# Altium PCB 4_iip_camera.PcbDoc
Units mm, origin at the board's own origin, x right, y up, seen from the top; angles counter-clockwise.
Board outline 67.5 x 28 mm, 2 copper layers (Top Layer, Bottom Layer), stack 1.571 mm thick; 4 components, 1 nets, 7 pads, 0 vias.
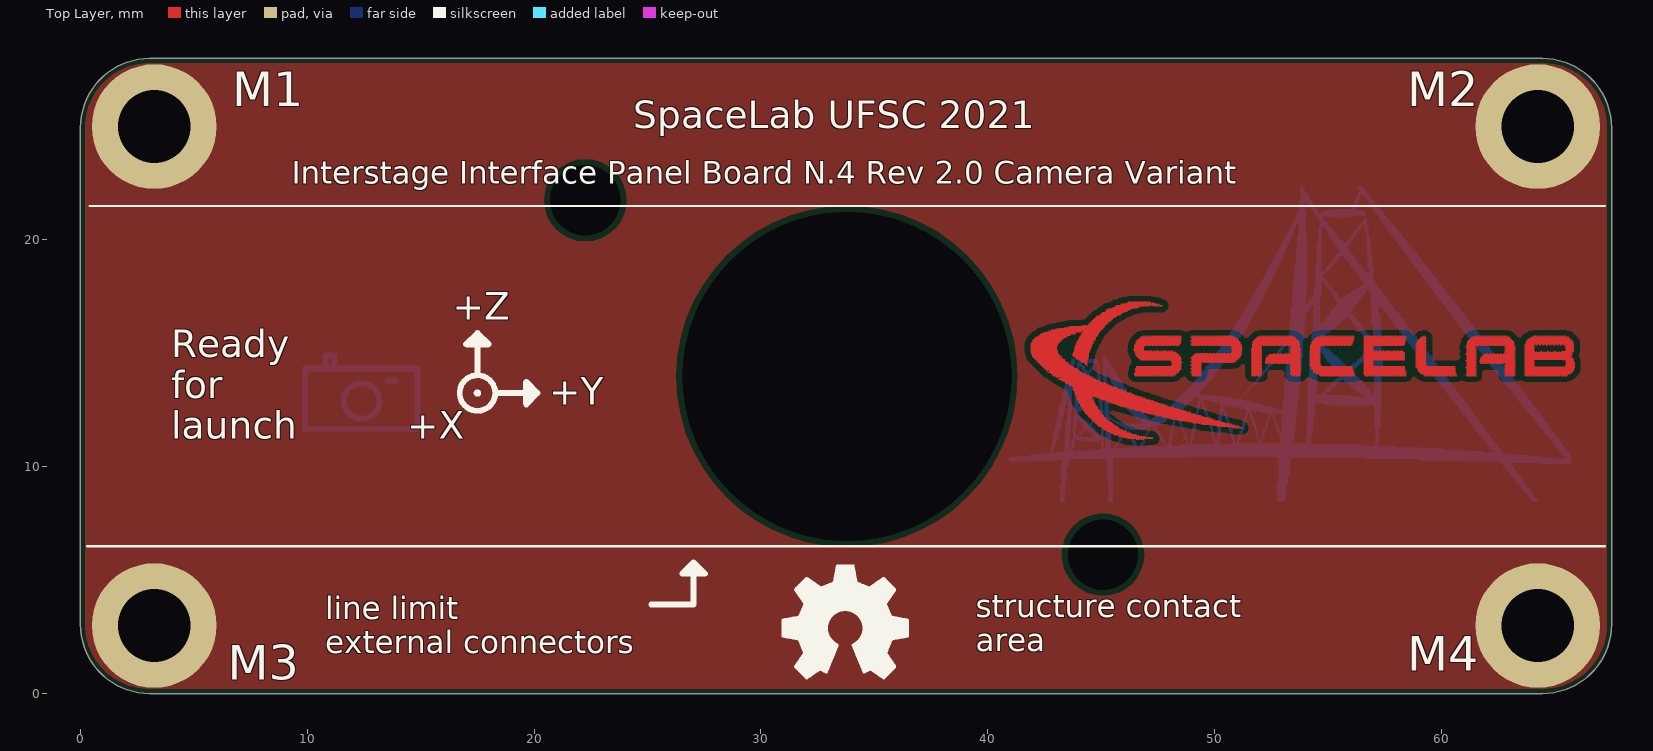
[diagram p0: Top Layer view]
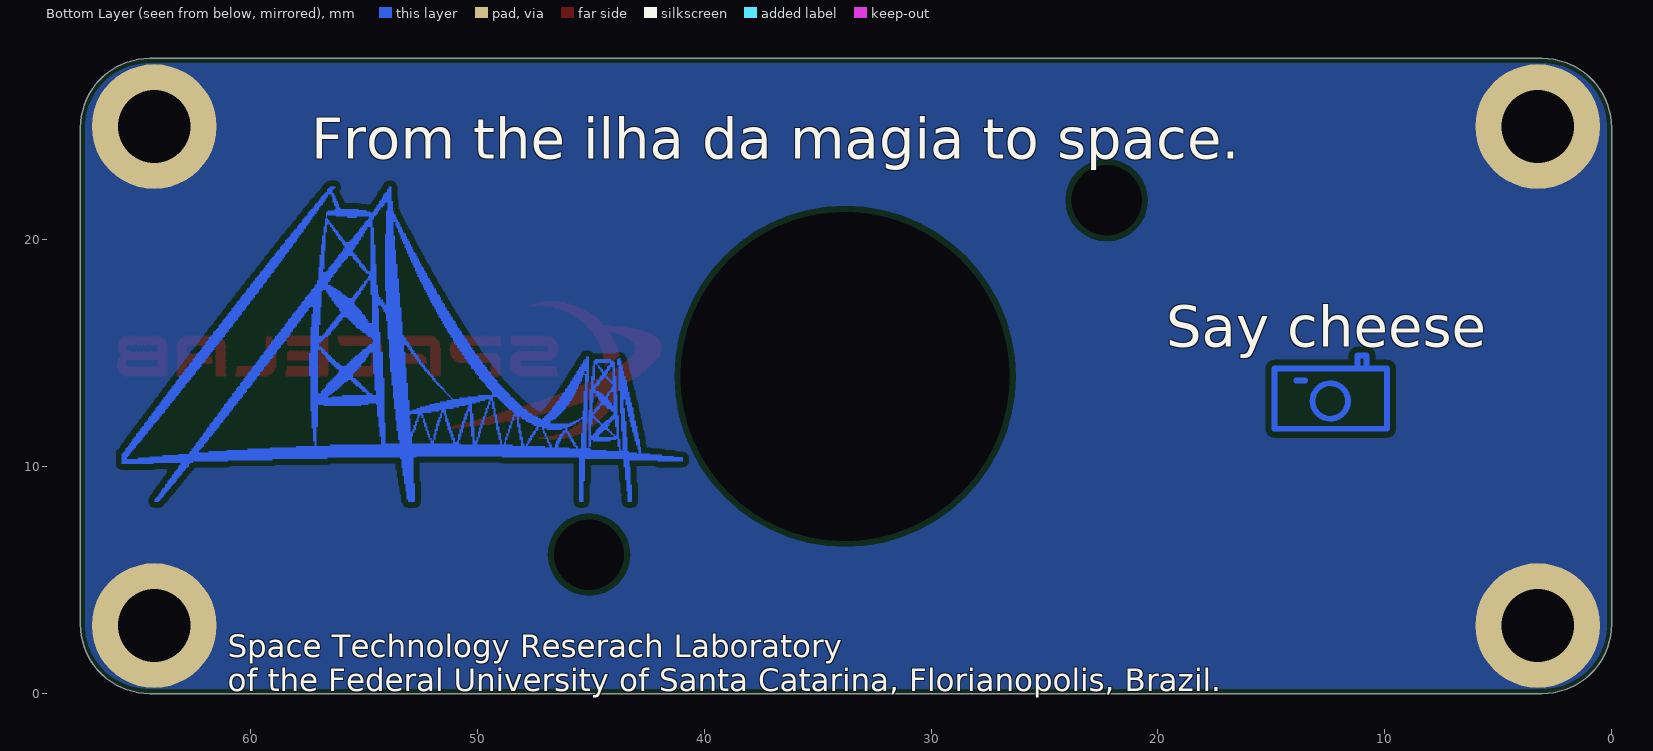
[diagram p1: Bottom Layer view, seen from below]

## Layer stack, top to bottom
Top Solder: solder mask 0.0102, Solder Resist, Dk 3.5
Top Layer: signal copper 0.0356
Dielectric 1: dielectric 1.5, FR-4, Dk 4.8
Bottom Layer: signal copper 0.0356
Bottom Solder: solder mask 0.0102, Solder Resist, Dk 3.5

## Board outline
0,3.048 ccw(c3.048,3.048) 3.048,0 64.452,0 ccw(c64.452,3.048) 67.5,3.048 67.5,24.952 ccw(c64.452,24.952) 64.452,28 3.048,28 ccw(c3.048,24.952) 0,24.952

## Design rules (kind name [scope] priority, off if disabled: settings)
BoardOutlineClearance BoardOutlineClearance_JLCPCB [All] p1: gap=0.2 ignorepadtopadclearanceinfootprint=FALSE
BoardOutlineClearance [All] p2: gap=0.254 ignorepadtopadclearanceinfootprint=FALSE except(0: Arc-SplitContinuation Track-SplitContinuation SMDPad-SplitContinuation THPad-SplitContinuation Via-SplitContinuation Fill-SplitContinuation Poly-SplitContinuation Region-SplitContinuation Text-SplitContinuation)
Clearance Clearance_JLCPCB_capabilities [All] p1: gap=0.254 ignorepadtopadclearanceinfootprint=FALSE except(0: SMDPad-Hole THPad-Hole Via-Hole Fill-Hole Poly-Hole Region-Hole Text-Hole; 0.127: Arc-Arc Arc-Track Track-Track SMDPad-SMDPad; 0.15: SMDPad-Text THPad-Text; 0.152: SMDPad-THPad; 0.2: Arc-SMDPad Track-SMDPad; 0.33: Arc-THPad Track-THPad; 0.54: THPad-THPad) // Minimal clearances considering JLCPCB manufacturing
Clearance [All] p2: gap=0.254 ignorepadtopadclearanceinfootprint=FALSE except(0: Arc-Hole Track-Hole SMDPad-Hole THPad-Hole Via-Hole Fill-Hole Poly-Hole Region-Hole Text-Hole) // Default altium designer clearence rule
HoleSize HoleSize_JLCPCB_capabilities [All] p1: absolutevalues=TRUE maxlimit=6.3 minlimit=0.3 maxpercent=80.000 minpercent=20.000
HoleSize [All] p2: absolutevalues=TRUE maxlimit=2.54 minlimit=0.025 maxpercent=80.000 minpercent=20.000
HoleToHoleClearance HoleToHoleClearance_JLCPCB [All] p1: gap=0.54 allowstackedmicrovias=TRUE
HoleToHoleClearance [All] p2: gap=0.254 allowstackedmicrovias=TRUE
MinimumAnnularRing AnnularRing_JLCPCB_1oz_capabilities [All] p1: minimumring=0.13
MinimumAnnularRing [All] p2: minimumring=0.254
MinimumSolderMaskSliver MinimumSolderMaskSliver_JLCPCB [All] p1: minsoldermaskwidth=0.2
MinimumSolderMaskSliver [All] p2: minsoldermaskwidth=0.254
PolygonConnect PolygonConnect_GND [InNet('GND')] p1: connectstyle=Direct reliefconductorwidth=0.254 reliefentries=4 polygonreliefangle="90 Angle" airgapwidth=0.254
PolygonConnect PolygonConnect_Power [(InNet('JTAG3_VCC') OR InNet('JTAG4_VCC'))] p2: connectstyle=Direct reliefconductorwidth=0.254 reliefentries=4 polygonreliefangle="90 Angle" airgapwidth=0.254 // Power polygons for power nets (debugger and battery charger)
PolygonConnect [All] p3: connectstyle=Relief reliefconductorwidth=0.254 reliefentries=4 polygonreliefangle="90 Angle" airgapwidth=0.254
RoutingVias RoutingVias_JLCPCB_capabilities [All] p1: holewidth=0.3 width=0.6 viastyle="Through Hole" minholewidth=0.3 minwidth=0.6 maxholewidth=0.711 maxwidth=1.27
RoutingVias [All] p2: holewidth=0.711 width=1.27 viastyle="Through Hole" minholewidth=0.711 minwidth=1.27 maxholewidth=0.711 maxwidth=1.27
SilkToSolderMaskClearance SilkToSolderMaskClearance_JLCPCB [IsPad] p1: minsilkscreentomaskgap=0.15 clearancetoexposedcopper=TRUE
SilkToSolderMaskClearance [IsPad] p2: minsilkscreentomaskgap=0.254 clearancetoexposedcopper=TRUE
SolderMaskExpansion SolderMaskExpansion_JLCPCB [All] p1: expansion=0.05
SolderMaskExpansion [All] p2: expansion=0.102
Width Width_JLCPCB_capabilities [All] p1: maxlimit=0.508 minlimit=0.127 preferedwidth=0.254 minimp=50.000000 maximp=50.000000 favimp=50.000000 // Width considering JLCPCB manufacturing
Width [All] p2: maxlimit=0.254 minlimit=0.254 preferedwidth=0.254
26 further rules are at their usual default settings.

## Components (designator, comment, footprint, x,y, rotation, side; value= is the part's Value field where it differs from the comment)
M1 "IB Mechanical Hole" "M3 hole (5.5mm pad)"#1 3.25,25 r0 top
M2 "IB Mechanical Hole" "M3 hole (5.5mm pad)"#1 64.25,25 r0 top
M3 "IB Mechanical Hole" "M3 hole (5.5mm pad)"#2 3.25,2 r0 top
M4 "IB Mechanical Hole" "M3 hole (5.5mm pad)"#2 64.25,2 r0 top

## Footprints (in the part's own frame and the unit in brackets; to place one, negate y for a bottom-side part, rotate by r counter-clockwise, add the part's x,y. Pads: shape width x height; smd on the part's side, far side on the other; paste and mask are expansions set on the pad)
"M3 hole (5.5mm pad)"#1 [mm]
  round 5.5 hole 3.2: 0(0,0)
"M3 hole (5.5mm pad)"#2 [mm]
  round 5.5 hole 3.2: 0(0,1)

## Part data
M1 M2 M3 M4: "Mechanical Hole for FloripaSat-2 interface boards"

## Free pads (board coordinates)
  round 0 hole 3.1: 0(22.257,21.747) 0(45.077,6.127)
  round 0 hole 14.5: 0(33.787,13.987)

## Nets (pads, with @x,y where several pads share a name; then routed paths per layer and width w, separated by ;. In a path a pad name is that pad's centre, name@x,y a point inside that pad or via, vN(x,y) a via of type N, cw(c..) or ccw(c..) an arc to the next point about the centre after c; other vN are vias at no path point)
GND: M1.0 M2.0 M3.0 M4.0
copper on no net: | length 22
  Bottom Layer w0.254: 10.8,14.4 10.8,14.9 11.197,14.9 11.2,14.897 11.2,14.338 ; 13.5,13.8 13.9,13.8 ; 9.9,11.671 14.862,11.671 14.862,14.338 9.9,14.338 9.9,11.671 ; 13.181,12.9 ccw(c12.4,12.9) 13.181,12.9

## Polygon pours and split planes (outlines as drawn)
GND on Top Layer "Top Layer-GND" (solid, remove dead copper, pour order 12): 0,24.952 cw(c3.048,24.952) 3.048,28 64.452,28 cw(c64.452,24.952) 67.5,24.952 67.5,3.048 cw(c64.452,3.048) 64.452,0 3.048,0 cw(c3.048,3.048) 0,3.048
GND on Bottom Layer "Top Layer-GND" (solid, remove dead copper, pour order 20): 0,24.952 cw(c3.048,24.952) 3.048,28 64.452,28 cw(c64.452,24.952) 67.5,24.952 67.5,3.048 cw(c64.452,3.048) 64.452,0 3.048,0 cw(c3.048,3.048) 0,3.048

## Other copper
Top Layer:
  region: 1334 vertices and 3 holes, not listed, extent 41.887,11.194 51.228,17.267
  region: 253 vertices and 3 holes, not listed, extent 63.682,14 65.873,15.768
  region: 386 vertices and 0 holes, not listed, extent 46.423,14 48.575,15.768
  region: 387 vertices and 0 holes, not listed, extent 56.571,14 58.454,15.768
  region: 511 vertices and 0 holes, not listed, extent 51.612,14 53.803,15.768
  region: 495 vertices and 0 holes, not listed, extent 61.068,14 63.259,15.768
  region: 407 vertices and 0 holes, not listed, extent 48.96,14 51.228,15.768
  region: 301 vertices and 0 holes, not listed, extent 54.187,14 56.148,15.768
  region: 201 vertices and 0 holes, not listed, extent 58.877,14 60.684,15.768
  region: 47.268,11.27 47.307,11.27 47.307,11.232 47.268,11.232 47.268,11.27 47.23,11.27 47.23,11.309 47.268,11.309
  text "'.Layer_Name'" at 177.571,-11.538 h2.5
Bottom Layer:
  region: 1551 vertices and 46 holes, not listed, extent 40.947,8.45 65.674,22.341
  text "'.Layer_Name'" at 177.571,-11.538 h2.5

## Silkscreen, mask and mechanical layers (free items; w line width, h text height)
Top Overlay:
  drawing of 988 lines, arcs and shapes, not listed
  text "SpaceLab UFSC 2021" at 24.375,24.925 h1.2
  text "Interstage Interface Panel Board N.4 Rev 2.0 Camera Variant" at 9.317,22.475 h1
  text "+Z" at 16.41,16.475 h1.2
  text "+Y" at 20.66,12.725 h1.2
  text "Ready / for / launch" at 4,11.225 h1.2
  text "+X" at 14.41,11.225 h1.2
  text "structure contact / area" at 39.475,1.869 h1
  text "line limit  / external connectors" at 10.8,1.784 h1
  text "'.Layer_Name'" at 177.571,-11.538 h2.5
Bottom Overlay:
  text "From the ilha da magia to space." at 57.325,23.575 h1.8
  text "Say cheese" at 19.634,15.291 h1.8
  text "Space Technology Reserach Laboratory / of the Federal University of Santa Catarina, Florianopolis, Brazil." at 61,0.1 h1
  text "'.Layer_Name'" at 177.571,-11.538 h2.5
Top Paste:
  text "'.Layer_Name'" at 177.571,-11.538 h2.5
Bottom Paste:
  text "'.Layer_Name'" at 177.571,-11.538 h2.5
Top Solder:
  drawing of 10 lines, arcs and shapes, not listed
  text "'.Layer_Name'" at 177.571,-11.538 h2.5
Bottom Solder:
  drawing of 11 lines, arcs and shapes, not listed
  text "'.Layer_Name'" at 177.571,-11.538 h2.5
Drill Guide:
  text "'.Layer_Name'" at 177.571,-11.538 h2.5
Board Edge:
  lines w0.2: 0,3.065 ccw(c3.065,3.065) 3.065,0 64.435,0 ccw(c64.435,3.065) 67.5,3.065 67.5,24.959 ccw(c64.459,24.959) 64.459,28 3.139,28 ccw(c3.139,24.861) 0,24.861 0,13.8 0,3.065
  text "'.Layer_Name'" at 193.8,-11.5 h2.5
Dimensions:
  circle w0.254: c33.75,14 r7.25
  circle w0.254: c22.257,21.747 r1.55
  circle w0.254: c45.077,6.127 r1.55
  circle w1: c33.75,14 r0.5
  circle w0.2: c64.25,25 r1.6
  circle w0.2: c64.25,2.975 r1.6
  circle w0.2: c3.25,3 r1.6
  circle w0.2: c3.25,25 r1.6
  region: 59,8.06 58.5,7.56 58,8.06
  lines w0.2: 0.3,6.5 67.15,6.5 ; 0.3,21.5 67.15,21.5
  lines w0.254: 32.64,11.697 34.915,11.697 ; 33.765,10.547 33.765,12.822 ; 35.098,16.157 35.098,15.157 ; 35.18,11.024 40.873,9.498 ; 35.686,10.183 35.186,11.049 36.052,11.549 ; 36.097,15.158 35.098,15.157 ; 40.347,20.408 35.098,15.157 ; 58,7.935 58.5,7.435 ; 58.5,10.1 58.5,9.3 58.5,7.435 ; 59,7.935 58.5,7.435 ; 18.547,-3.443 49.027,-3.443 49.027,26.837 18.547,26.837 18.547,-3.443
  text "Mechanical specs:" at 13.35,35.25 h1.5
  text "structure  / contact  / area" at 50.35,22.2 h1.2
  text "camera lens center" at 40.722,18.832 h1
  text "camera lens hole" at 28.5,14.1 h1
  text "external  / connectors  / area" at 3.1,11.6 h1.2
  text "line limit  / external  / connectors" at 52.1,10.6 h1.2
  text "camera / board / center" at 41.55,8.06 h1
  text "structure  / contact  / area" at 50.025,0.675 h1.2
  text "'.Layer_Name'" at 177.571,-11.538 h2.5
BOTTOM ASM:
  text "'.Layer_Name'" at 177.601,-11.533 h2.5
TOP ASM:
  text "'.Layer_Name'" at 177.571,-11.538 h2.5
Sheet:
  drawing of 228 lines, arcs and shapes, not listed
  text "1" at 8.746,161.611 h1.78
  text "2" at 81.39,161.611 h1.78
  text "3" at 154.542,161.611 h1.78
  text "4" at 227.44,161.611 h1.78
  text "A" at -25.595,138.599 h1.78
  text "A" at 261.425,138.599 h1.78
  text "B" at -25.595,90.542 h1.78
  text "B" at 261.425,90.542 h1.78
  text "Layer" at 2.515,75.2 h1.2
  text "Name" at 10.713,75.2 h1.2
  text "Material" at 29.308,75.2 h1.2
  text "Thickness" at 46.503,75.2 h1.2
  text "Constant" at 59.5,75.2 h1.2
  text "Board Layer Stack" at 70.897,75.2 h1.2
  text "1" at 2.515,72.8 h1.2
  text "Top Overlay" at 10.713,72.8 h1.2
  text "2" at 2.515,70.4 h1.2
  text "Top Solder" at 10.713,70.4 h1.2
  text "Solder Resist" at 29.308,70.4 h1.2
  text "0.010mm" at 46.503,70.4 h1.2
  text "3.5" at 59.5,70.4 h1.2
  text "3" at 2.515,68 h1.2
  text "Top Layer" at 10.713,68 h1.2
  text "Copper" at 29.308,68 h1.2
  text "0.036mm" at 46.503,68 h1.2
  text "4" at 2.515,65.6 h1.2
  text "Dielectric 1" at 10.713,65.6 h1.2
  text "FR-4" at 29.308,65.6 h1.2
  text "1.500mm" at 46.503,65.6 h1.2
  text "4.8" at 59.5,65.6 h1.2
  text "5" at 2.515,63.2 h1.2
  text "Bottom Layer" at 10.713,63.2 h1.2
  text "Copper" at 29.308,63.2 h1.2
  text "0.036mm" at 46.503,63.2 h1.2
  text "6" at 2.515,60.8 h1.2
  text "Bottom Solder" at 10.713,60.8 h1.2
  text "Solder Resist" at 29.308,60.8 h1.2
  text "0.010mm" at 46.503,60.8 h1.2
  text "3.5" at 59.5,60.8 h1.2
  text "7" at 2.515,58.4 h1.2
  text "Bottom Overlay" at 10.713,58.4 h1.2
  text "Fabrication specifications:" at 139.357,54.778 h3.1
  text "C" at -25.595,42.028 h1.78
  text "C" at 261.425,42.028 h1.78
  text "- Copper base: 1oz  / - PCB Material: Prepeg FR4-Standard / - PCB Tickness: 1.6mm / - PCB Surface: HASL (with lead)" at 139.351,37.794 h1.73
  text "- Silkscreen Color: White (top and bottom) / - Soldermask Color: Green / - Stack-up: Standard 2 layer 1.6mm thickness / - Special requirements: None" at 197.051,37.794 h1.73
  text "SpaceLab - Federal University of Santa Catarina" at 170.5,-2 h2.5
  text "D" at -25.595,-5.978 h1.78
  text "D" at 261.425,-5.978 h1.78
  text "Project:" at 170.5,-6.5 h2.5
  text "Interstage Interface Panel Nº4" at 178.5,-6.5 h2.5
  text "Layer:" at 170.5,-11.5 h2.5
  text "Designed by:" at 170.5,-16.5 h2.5
  text "Project Code:" at 228.5,-16.5 h2.5
  text "IIP4" at 243,-16.5 h2.5
  text "Yan C. de Azeredo" at 184.426,-16.533 h2.5
  text "v2.0" at 208.526,-21.433 h2.5
  text "Date:" at 170.5,-21.5 h2.5
  text "'.Print_Date'" at 176.5,-21.5 h2.5
  text "Version:" at 199.5,-21.5 h2.5
  text "Size:" at 228.5,-21.5 h2.5
  text "A4" at 234.5,-21.5 h2.5
  text "1" at 8.746,-26.349 h1.78
  text "2" at 81.39,-26.349 h1.78
  text "3" at 154.542,-26.349 h1.78
  text "4" at 227.44,-26.349 h1.78
Drill Drawing:
  circle w0.2: c-14.314,50.317 r0.667
  lines w0.2: -14.981,43.983 -14.647,43.983 -14.314,43.65 -13.981,43.983 -13.647,43.983 -13.981,44.317 -13.647,44.65 -13.981,44.65 -14.314,44.983 -14.647,44.65 -14.981,44.65 -14.647,44.317 -14.981,43.983 ; -14.981,46.65 -13.647,46.65 -13.647,47.983 -14.981,47.983 -14.981,46.65
  lines w0.3: -16.176,42.75 124.026,42.75 ; -16.176,51.75 124.026,51.75 ; -5.159,39.75 -5.159,54.75 ; 4.439,39.75 4.439,54.75 ; 28.632,39.75 28.632,54.75 ; 38.749,39.75 38.749,54.75 ; 53.425,39.75 53.425,54.75 ; 83.416,39.75 83.416,54.75 ; 95.213,39.75 95.213,54.75 ; 110.129,39.75 110.129,54.75 ; -16.176,39.75 124.026,39.75 124.026,54.75 -16.176,54.75 -16.176,39.75
  text "Symbol" at -14.376,52.65 h1.44
  text "Count" at -4.259,52.65 h1.44
  text "Hole Size" at 5.339,52.65 h1.44
  text "Plated" at 29.532,52.65 h1.44
  text "Hole Type" at 39.649,52.65 h1.44
  text "Drill Layer Pair" at 54.325,52.65 h1.44
  text "Via/Pad" at 84.316,52.65 h1.44
  text "Pad Shape" at 96.113,52.65 h1.44
  text "Template" at 111.029,52.65 h1.44
  text "2" at -4.259,49.65 h1.2
  text "3.100mm (122.05mil)" at 5.339,49.65 h1.2
  text "PTH" at 29.532,49.65 h1.2
  text "Round" at 39.649,49.65 h1.2
  text "Top Layer - Bottom Layer" at 54.325,49.65 h1.2
  text "Pad" at 84.316,49.65 h1.2
  text "Rounded" at 96.113,49.65 h1.2
  text "c0h310" at 111.029,49.65 h1.2
  text "4" at -4.259,46.65 h1.2
  text "3.200mm (125.98mil)" at 5.339,46.65 h1.2
  text "PTH" at 29.532,46.65 h1.2
  text "Round" at 39.649,46.65 h1.2
  text "Top Layer - Bottom Layer" at 54.325,46.65 h1.2
  text "Pad" at 84.316,46.65 h1.2
  text "Rounded" at 96.113,46.65 h1.2
  text "c550h320" at 111.029,46.65 h1.2
  text "1" at -4.259,43.65 h1.2
  text "14.500mm (570.87mil)" at 5.339,43.65 h1.2
  text "PTH" at 29.532,43.65 h1.2
  text "Round" at 39.649,43.65 h1.2
  text "Top Layer - Bottom Layer" at 54.325,43.65 h1.2
  text "Pad" at 84.316,43.65 h1.2
  text "Rounded" at 96.113,43.65 h1.2
  text "c0h1450" at 111.029,43.65 h1.2
  text "7 Total" at -4.259,40.65 h1.2
  text "'.Layer_Name'" at 177.571,-11.538 h2.5
  text "'.Layer_Name'" at 177.571,-11.538 h2.5

## Dimensions
22.257,23.297 to 18.547,26.837 on Dimensions
33.75,21.25 to 0,3.048 on Dimensions
18.547,-3.443 to 18.547,26.837 on Dimensions
20.707,21.747 to 18.547,-3.443 on Dimensions
49,-3.443 to 46.627,6.127 on Dimensions
45.077,6.127 to 22.257,21.747 on Dimensions
18.547,26.837 to 49.027,26.837 on Dimensions
33.75,14 to 45.875,12.525 on Dimensions
22.257,21.747 to 25.285,24.775 on Dimensions
3.25,3 to 16.275,3.2 on Dimensions
64.25,3 to 64.25,25 on Dimensions
2.95,28 to 2.95,21.5 on Dimensions
-0.275,6.5 to -0.275,21.5 on Dimensions
3.25,3 to 64.25,3 on Dimensions
0,28 to 67.5,28 on Dimensions
0,0 to 0,28 on Dimensions